# Allegro board splendera.brd
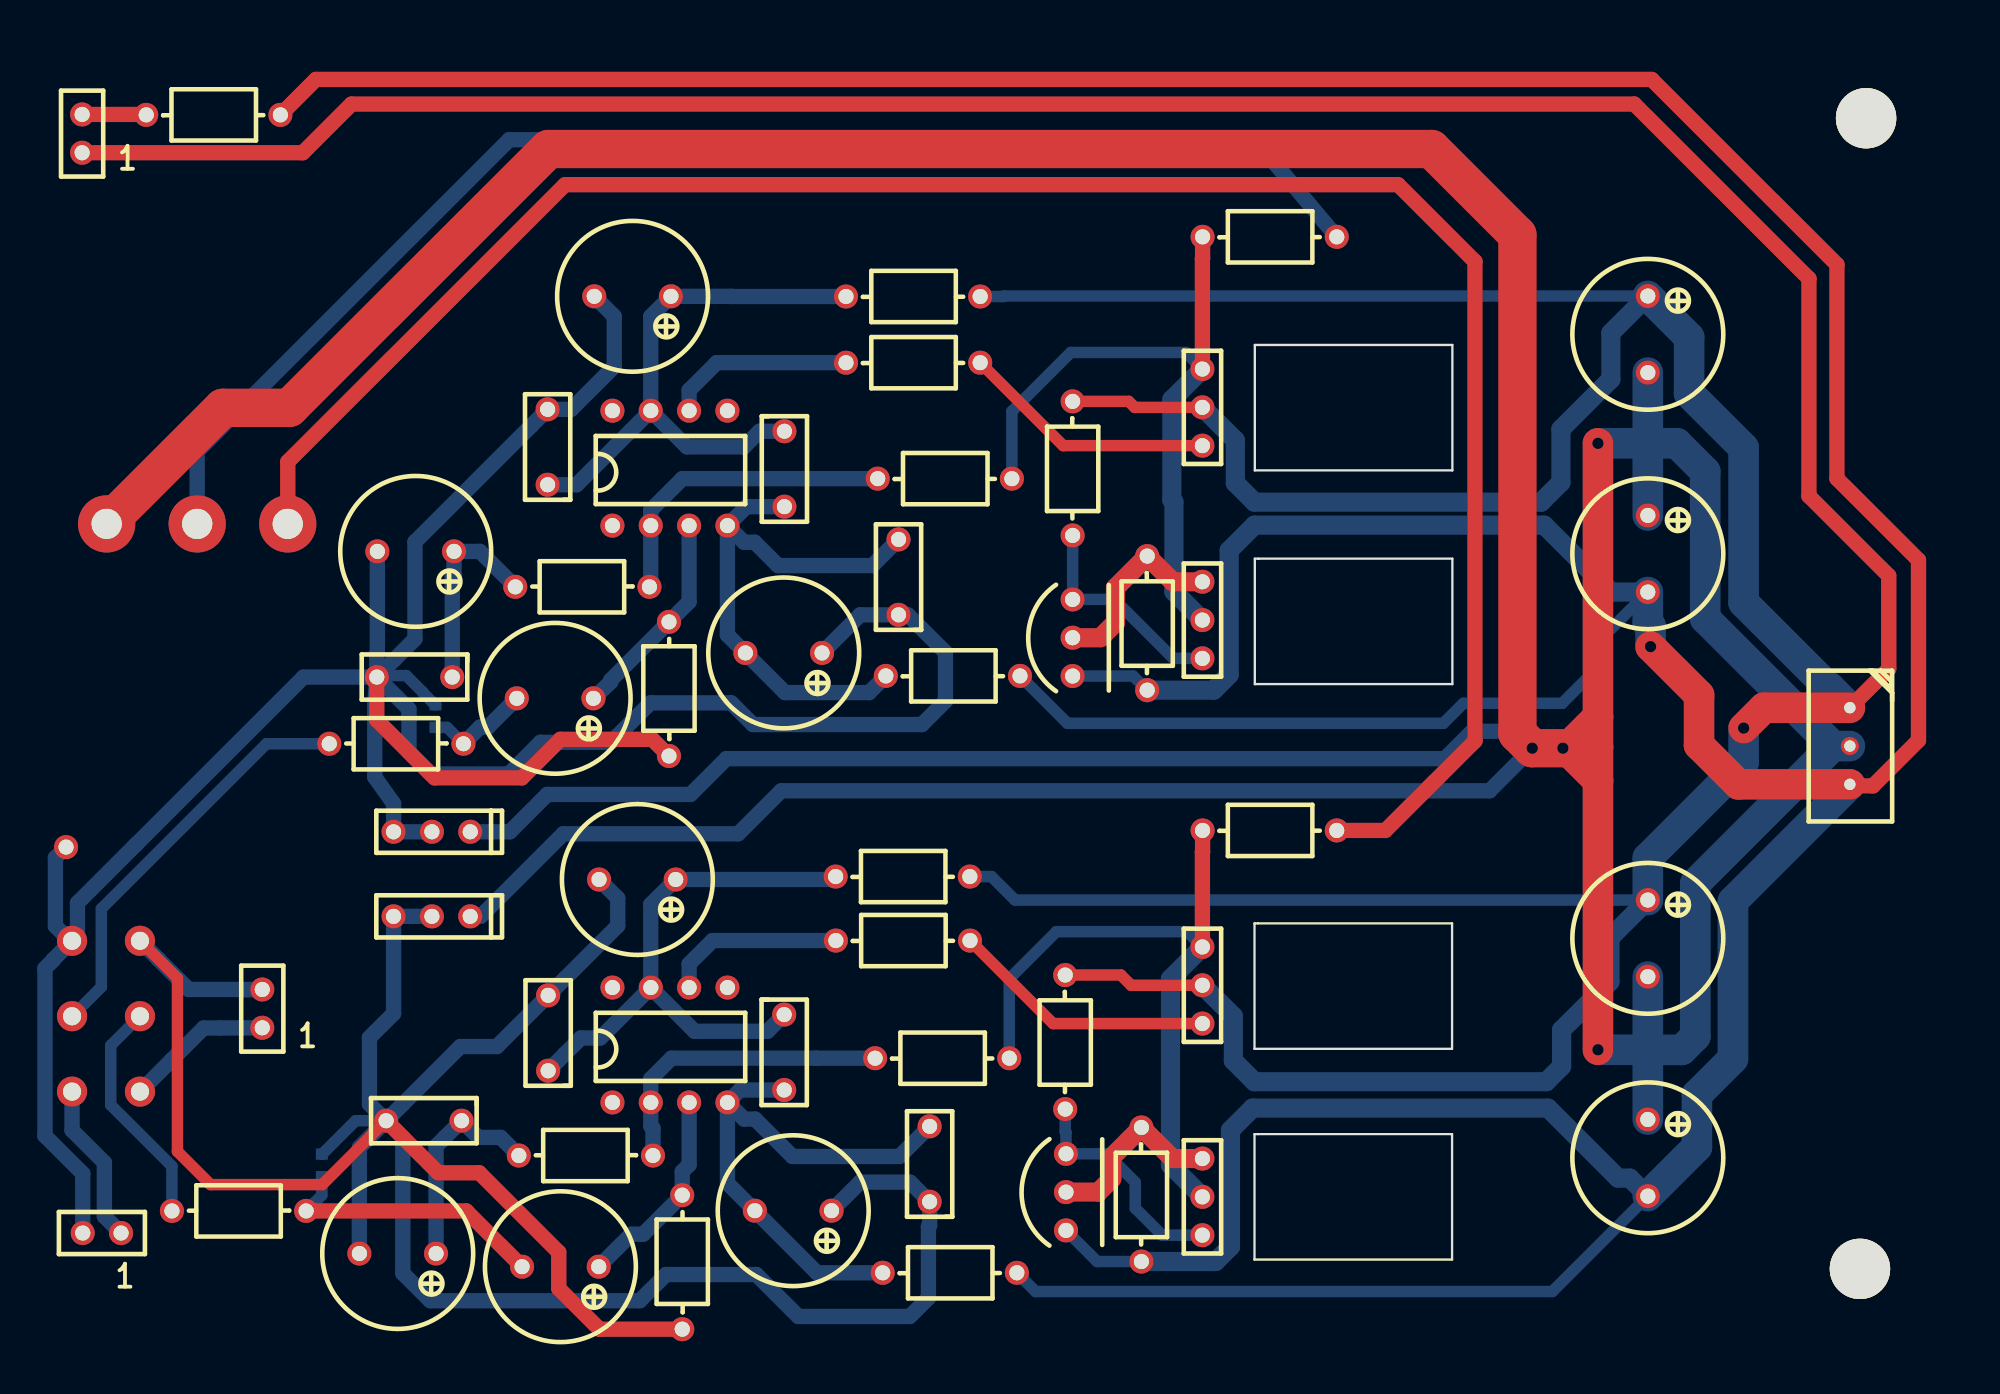
[diagram p0: board, top side]
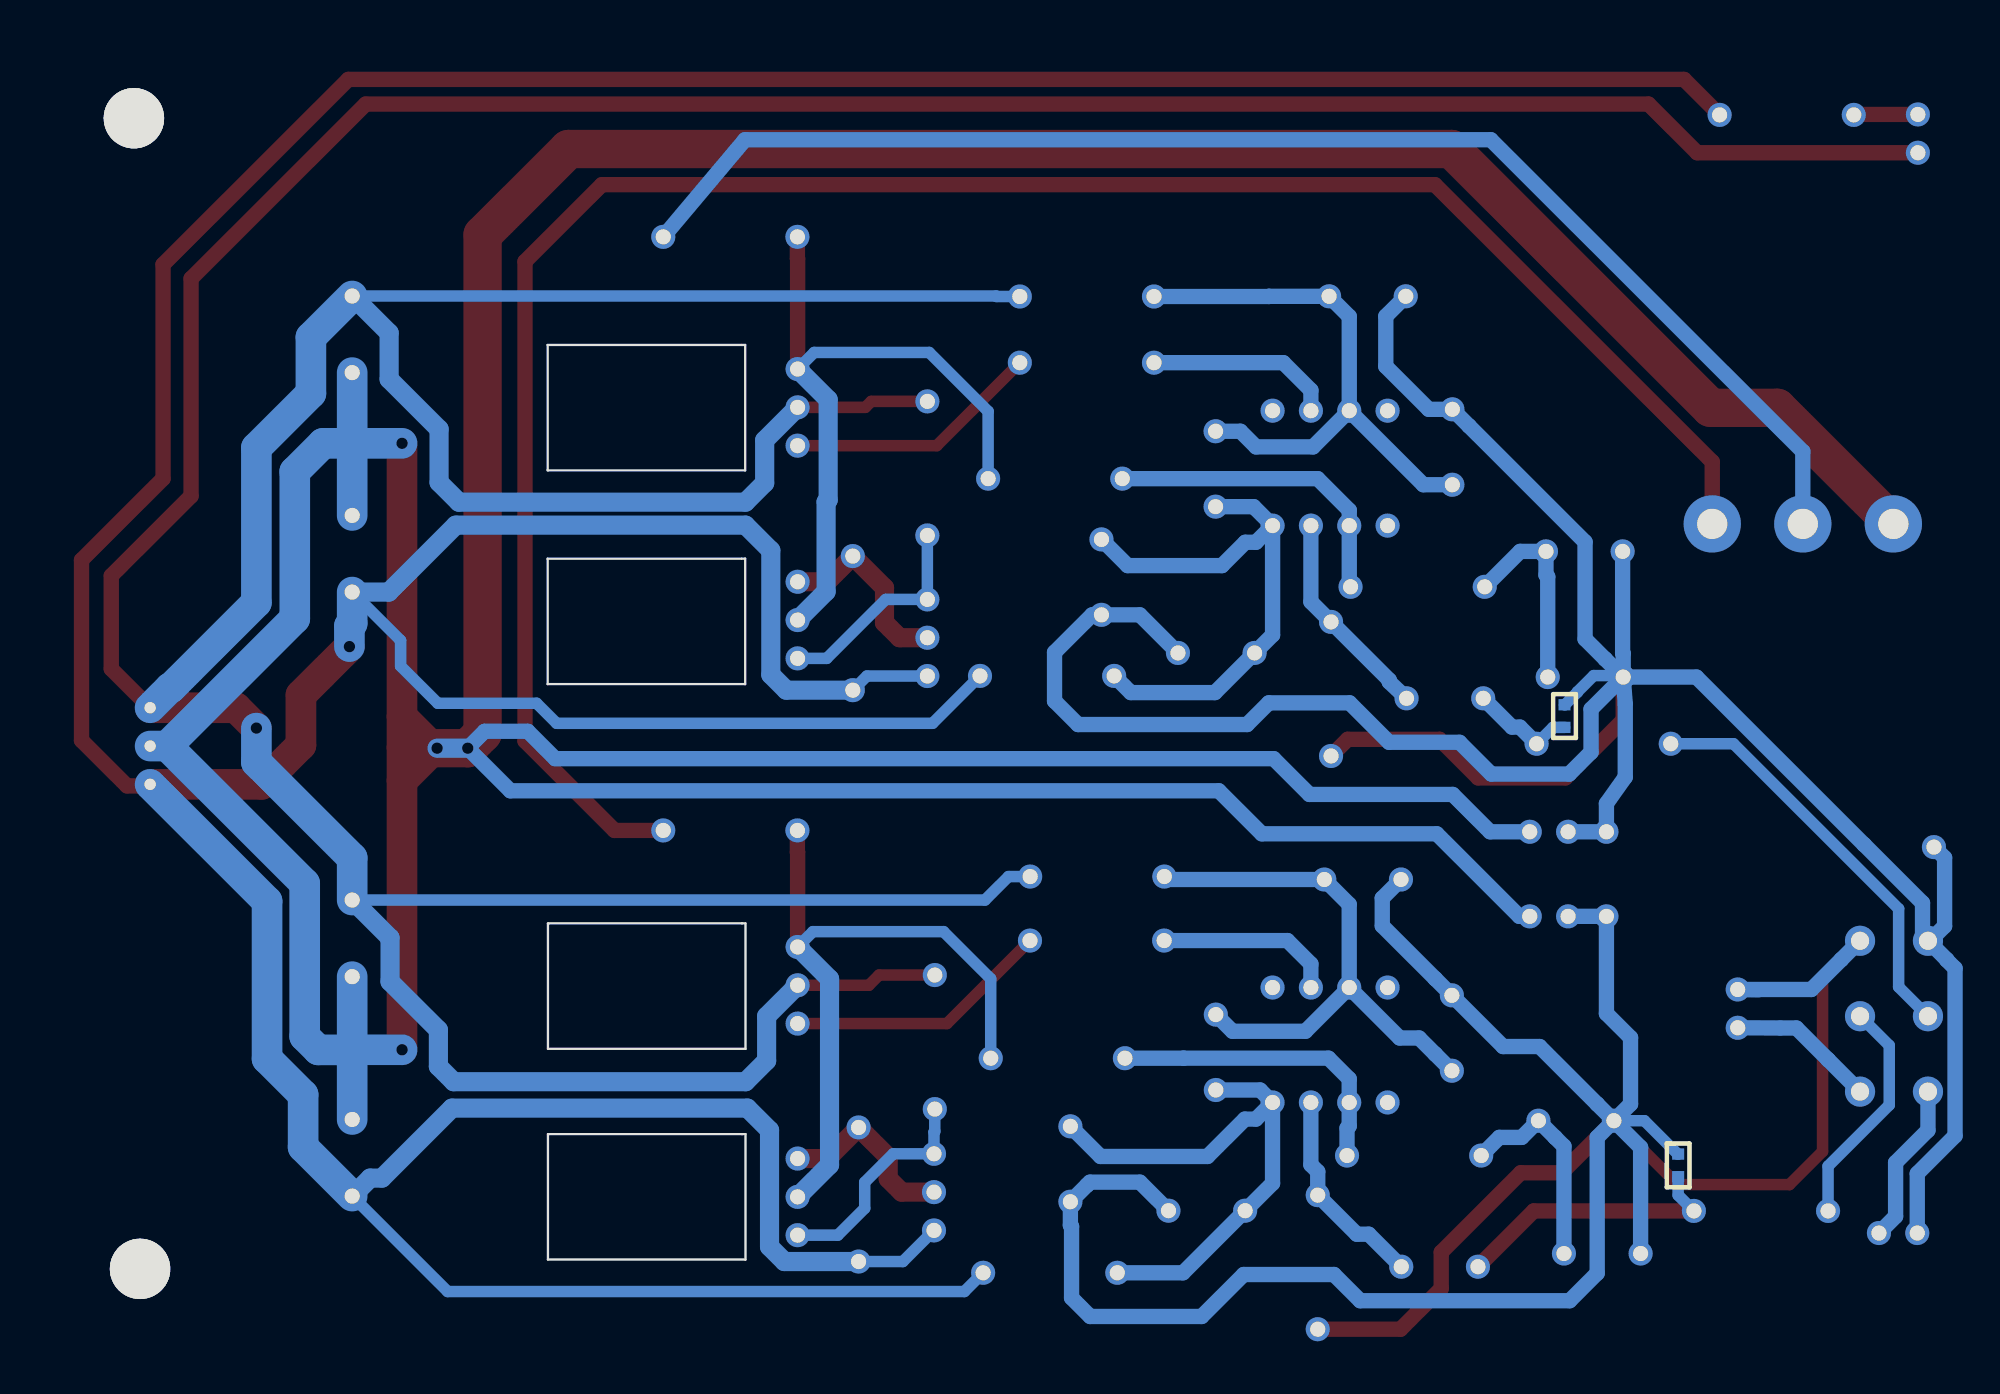
[diagram p1: board, bottom side, seen from below]

Outline 128.52 x 88.44 mm; copper layers: TOP, BOTTOM. Coordinates in mm from the lower left corner of the outline.
Outline path: 0,88.44 0,0 128.52,0 128.52,88.44 0,88.44 ; 81.13,29.21 94.22,29.21 94.22,20.89 81.13,20.89 81.13,29.21 ; 81.13,15.23 94.22,15.23 94.22,6.91 81.13,6.91 81.13,15.23 ; 81.15,67.56 94.24,67.56 94.24,59.24 81.15,59.24 81.15,67.56 ; 81.15,53.39 94.24,53.39 94.24,45.07 81.15,45.07 81.15,53.39

## Placement (name value [footprint] x y rotation side)
C1  330uF  [CAP_5P08_D10]  107.19 28.21 0 top
C2  330uF  [CAP_5P08_D10]  40.23 32.12 270 top
C3  0.1uF  [TH_FILM_5MM3]  34.32 21.94 180 top
C4  0.1uF  [TH_FILM_5MM3]  49.96 20.66 0 top
C5  47uF  [CAP_5P08_D10]  35.13 6.44 270 top
C6  47uF 35V  [CAP_5P08_D10]  24.35 7.32 270 top
C7  104  [TH_FILM_5MM3]  26.09 16.12 270 top
C8  0.1uF  [TH_FILM_5MM3]  59.6 13.25 180 top
C9  330uF  [CAP_5P08_D10]  50.56 10.15 270 top
C10  330uF  [CAP_5P08_D10]  107.19 13.66 0 top
C11  330uF  [CAP_5P08_D10]  107.19 68.27 0 top
C12  0.1uF  [TH_FILM_5MM3]  34.29 60.79 180 top
C13  330uF  [CAP_5P08_D10]  39.92 70.79 270 top
C14  0.1uF  [TH_FILM_5MM3]  49.98 59.34 0 top
C15  47uF  [CAP_5P08_D10]  34.78 44.13 270 top
C16  47uF 35V  [CAP_5P08_D10]  25.54 53.87 270 top
C17  104  [TH_FILM_5MM3]  25.47 45.54 270 top
C18  0.1uF  [TH_FILM_5MM3]  57.54 52.17 180 top
C19  330uF  [CAP_5P08_D10]  49.93 47.14 270 top
C20  330uF  [CAP_5P08_D10]  107.19 53.72 0 top
C21  100p  [C0603]  19.33 12.41 90 bottom
C22  100p  [C0603]  26.86 42.2 90 bottom
D1  LED  [JUMPER2]  3.44 81.58 180 top
J1  CON2  [JUMPER2]  15.38 23.55 180 top
J2  CON3  [POWER_IN3]  120.58 40.97 180 top
J3  CON2  [JUMPER2]  4.75 8.67 270 top
J4  CON3  [HP6P5_2]  11.07 56.55 90 top
Q1  9013  [T9013]  68.64 11.39 0 top
Q2  9013  [T9013]  69.08 48.15 0 top
R1  1k  [TH_RESISTOR1]  11.5 82.82 90 top
R2  47  [TH_RESISTOR1]  57.18 32.31 90 top
R3  1k  [TH_RESISTOR1]  68.58 21.97 0 top
R4  33  [TH_RESISTOR1]  57.2 28.07 90 top
R5  10k  [TH_RESISTOR1]  43.21 6.11 180 top
R6  100  [TH_RESISTOR1]  81.5 35.37 90 top
R7  ALPS617  [ALPS117G]  5.02 23.05 180 top
R8  10k  [TH_RESISTOR1]  59.8 20.27 90 top
R9  1k  [TH_RESISTOR1]  37.46 13.81 270 top
R10  6.8  [TH_RESISTOR1]  73.63 11.86 0 top
R11  47  [TH_RESISTOR1]  60.3 6.04 90 top
R12  47  [TH_RESISTOR1]  57.87 70.77 90 top
R13  1k  [TH_RESISTOR1]  69.08 60.01 0 top
R14  33  [TH_RESISTOR1]  57.87 66.39 90 top
R15  10k  [TH_RESISTOR1]  42.33 44.12 180 top
R16  100  [TH_RESISTOR1]  81.5 74.73 90 top
R17  10k  [TH_RESISTOR1]  59.97 58.7 90 top
R18  1k  [TH_RESISTOR1]  37.22 51.52 270 top
R19  6.8  [TH_RESISTOR1]  74.02 49.75 0 top
R20  47  [TH_RESISTOR1]  60.51 45.62 90 top
R21  1k  [TH_RESISTOR1]  24.9 41.12 270 top
R22  100k  [VAR_RES3]  21.54 35.28 270 top
R23  100k  [VAR_RES3]  21.54 29.67 270 top
R24  1k  [TH_RESISTOR1]  14.47 10.14 270 top
TP1  TEST POINT  [TH_TEST1]  2.38 36.8 0 top
TP2  HOLE D=4mm  [HOLE_4P0]  121.24 6.3 0 top
TP3  HOLE D=4mm  [HOLE_4P0]  121.65 82.6 0 top
U1  MJE340_ON  [MJE340_SMALL]  77.67 25.1 0 top
U2  NE5534  [NE5532DIP]  42.39 21.14 90 top
U3  MJE340_ON  [MJE340_SMALL]  77.67 11.07 0 top
U4  MJE340_ON  [MJE340_SMALL]  77.67 63.42 0 top
U5  NE5534  [NE5532DIP]  42.39 59.39 90 top
U6  MJE340_ON  [MJE340_SMALL]  77.67 49.32 0 top

## Library data of the parts
C1 C2 C6 C9-C11 C13 C16 C19 C20 = C_elect_0
C3-C5 C7 C8 C12 C14 C15 C17 C18 C21 C22 = C
D1 = LED
J1 J3 = CON2
J2 J4 = CON3
Q1 Q2 = Q2N3904
R1-R6 R8-R21 R24 = R
R7 = ALPS617
R22 R23 = RESISTOR VAR
TP1-TP3 = TEST POINT
U1 U3 U4 U6 = MJE340_ON
U2 U5 = NE5534_0

## Footprints (pads in the part's own frame, mm; a bottom-side part is the same pattern mirrored in y, then rotated)
ALPS117G
  round 2 hole 1.2: 1(-2.25,5) 2(-2.25,0) 3(-2.25,-5) 4(2.25,5) 5(2.25,0) 6(2.25,-5)
C0603
  rect 0.75x0.8 smd: 1(0.004,0) 2(1.504,0)
CAP_5P08_D10
  round 1.6 hole 1: 1(0,2.54) 2(0,-2.54)
HOLE_4P0
  round 4 hole 4: 1(0,0)
HP6P5_2
  round 3.8 hole 2: 1(-0.858,6) 2(-0.858,0) 3(-0.858,-6)
JUMPER2
  round 1.6 hole 1: 1(0,1.27) 2(0,-1.27)
MJE340_SMALL
  round 1.6 hole 1: 1(0,2.54) 2(0,0) 3(0,-2.54)
NE5532DIP
  round 1.6 hole 1: 1(-3.81,3.81) 2(-3.81,1.27) 3(-3.81,-1.27) 4(-3.81,-3.81) 5(3.81,-3.81) 6(3.81,-1.27) 7(3.81,1.27) 8(3.81,3.81)
POWER_IN3
  round 1.2 hole 0.75: 1(0,-2.54) 2(0,0) 3(0,2.54)
T9013
  round 1.6 hole 1: 1(0,-2.54) 2(0,0) 3(0,2.54)
TH_FILM_5MM3
  round 1.6 hole 1: 1(0,-2.5) 2(0,2.5)
TH_RESISTOR1
  round 1.6 hole 1: 1(0,-5.08) 2(0,3.81)
TH_TEST1
  round 1.6 hole 1: 1(0,-2.54)
VAR_RES3
  round 1.6 hole 1: 1(0,7.62) 2(0,5.08) 3(0,2.54)

## Nets
GND: C1.2(-) C10.1(+) C11.2(-) C20.1(+) J2.2 J4.1 R22.1(A) R23.1(A)
GND_SIGNAL_L: C2.2(-) C3.1 C6.2(-) C7.1 C8.2 C9.1(+) C21.2 J1.2 R5.2 R7.3 R23.2(WIPER) R23.3(B)
GND_SIGNAL_R: C12.1 C13.2(-) C16.2(-) C17.1 C18.2 C19.1(+) C22.2 J3.2 R7.6 R15.2 R22.2(WIPER) R22.3(B) TP1.1
VCC_9V: C1.1(+) C11.1(+) D1.1(ANODE) J2.1 R2.1 R3.2 R12.1 R13.2 U1.2(C) U4.2(C)
VCC_N9V: C10.2(-) C20.2(-) J2.3 Q1.1(E) Q2.1(E) R1.1 R10.1 R11.1 R19.1 R20.1
LEFT_IN: J1.1 R7.1
LEFT_OUT: J4.3 R6.1
RIGHT_IN: J3.1 R7.4
RIGHT_OUT: J4.2 R16.1
N191282: R8.2 R9.2 U2.2(-IN)
N191294: C6.1(+) C7.2 R9.1
N191348: Q1.2(B) R10.2 U3.1(E)
N191366: Q1.3(C) R3.1 U3.3(B)
N191426: R6.2 R8.1 U1.1(E) U3.2(C)
N219499: R7.2 R24.1
N254338: R4.1 U1.3(B)
N260066: R4.2 U2.6(OUT)
N264502: C5.1 R5.1 U2.3(+IN)
N269050: C2.1(+) C3.2 C4.2 R2.2 U2.7(V+)
N356031: D1.2(CATHODE) R1.2
N361933: C4.1 C8.1 C9.2(-) R11.2 U2.4(V-)
N373916: C14.1 C18.1 C19.2(-) R20.2 U5.4(V-)
N373962: R14.2 U5.6(OUT)
N373984: C16.1(+) C17.2 R18.1
N374114: C12.2 C13.1(+) C14.2 R12.2 U5.7(V+)
N374182: C15.1 R15.1 U5.3(+IN)
N374210: R16.2 R17.1 U4.1(E) U6.2(C)
N374220: Q2.3(C) R13.1 U6.3(B)
N374232: R14.1 U4.3(B)
N374310: R17.2 R18.2 U5.2(-IN)
N374370: Q2.2(B) R19.2 U6.1(E)
N374716: R7.5 R21.1
N393135: C15.2 C22.1 R21.2
N402757: C5.2 C21.1 R24.2

Pads without a net: TP2 1; TP3 1; U2 1 5 8; U5 1 5 8

## Via types
v1: diameter 1.2, hole 0.75, TOP to BOTTOM, 6 vias

## Routing (per net, layer and track width the routed paths; a pad name or vN(x,y) marks a point on that pad's centre or on a via; arc(x,y) is an arc through that point)
GND: length 421.3
  TOP w2.032: v1(103.88,61.04) 103.88,42.9 ; 103.88,42.9 101.8,40.82 ; 103.88,42.9 103.88,40.89 ; 103.88,38.66 v1(103.88,20.83) ; 103.88,38.66 103.88,40.89 ; 103.88,38.66 101.72,40.82 ; 101.72,40.82 101.8,40.82 ; 101.72,40.82 v1(101.56,40.82) ; 101.8,40.82 103.81,40.82 103.88,40.89
  TOP w2.54: J4.1 12.77,63.39 17.18,63.39 34.34,80.55 92.85,80.55 98.55,74.86 98.55,41.81 v1(99.53,40.82) v1(101.56,40.82)
  BOTTOM w1.016: R23.1 29.85,29.67 35.32,35.15 46.91,35.15 49.76,38 96.71,38 v1(99.53,40.82) 98.41,41.94 95.55,41.94 93.74,40.13 46.13,40.13 43.76,37.76 34.26,37.76 31.79,35.28 R22.1
  BOTTOM w1.27: v1(99.53,40.82) v1(101.56,40.82)
  BOTTOM w2.032: 107.19,61.04 v1(103.88,61.04) ; 107.19,61.04 C11.2 ; 107.19,61.04 C20.1 ; 107.19,61.04 109.12,61.04 110.99,59.16 110.99,49.42 119.44,40.97 ; 119.44,40.97 110.34,31.86 110.34,21.72 109.44,20.82 107.19,20.82 ; 119.44,40.97 J2.2 ; C10.1 107.19,20.82 ; 107.19,20.82 C1.2 ; 107.19,20.82 107.18,20.83 v1(103.88,20.83)
GND_SIGNAL_L: length 188
  TOP w0.762: R7.3 9.76,25.57 9.76,14.08 11.95,11.88 19.35,11.88 22.57,15.11 C7.1
  TOP w1.016: C7.1 27.04,12.67 29.75,12.67 35.02,7.4 35.02,4.99 37.72,2.3 R5.2
  BOTTOM w0.762: C7.1 21.56,16.12 19.35,13.91 C21.2
  BOTTOM w1.016: 14,24.8 J1.2 10.5,24.82 8.52,26.8 R7.3 ; C7.1 22.48,17.23 22.48,21.63 24.08,23.23 R23.3 R23.2 ; C7.1 24.69,15.02 24.69,6.01 26.52,4.18 40.39,4.18 42.13,5.92 48.12,5.92 50.9,3.14 58.28,3.14 59.52,4.38 59.52,9.11 59.6,9.19 C8.2 58.49,11.85 58.3,12.05 54.99,12.05 C9.1 ; C7.1 21.81,14.35 C6.2 ; C7.1 24.69,17.23 28.5,21.04 30.92,21.04 C3.1 35.43,25.54 38.93,29.05 38.93,30.88 C2.2
GND_SIGNAL_R: length 200.6
  TOP w1.016: R15.2 41.22,41.41 35.14,41.41 32.58,38.85 26.8,38.85 22.97,42.69 C17.1
  BOTTOM w0.762: 23.06,45.64 24.92,45.64 26.01,44.55 26.01,44.53 26.83,43.7 C22.2
  BOTTOM w1.016: 2.77,27.92 3.13,28.28 3.13,30.56 7.01,34.43 7.01,34.43 18.12,45.54 C17.1 ; 2.77,27.92 1.67,29.03 1.67,33.56 TP1.1 ; 2.77,27.92 R7.6 1.53,26.8 1.53,26.78 0.98,26.23 0.98,15.12 3.48,12.62 J3.2 ; C13.2 38.7,69.46 38.7,66.14 35.85,63.29 C12.1 33.18,62.19 25.49,54.5 25.49,48.07 24.17,46.74 23.06,45.64 C17.1 ; C16.2 23,47.14 22.97,47.1 C17.1 ; C17.1 25.1,43.41 25.1,40.56 26.55,39.11 31.7,39.11 33.81,41.21 38.48,41.21 41.1,43.83 46.45,43.83 47.89,42.39 59.09,42.39 60.65,43.95 60.65,47.18 58.16,49.67 C18.2 55,49.67 C19.1 ; C17.1 22.83,43.77 22.83,38.91 24.08,37.15 R22.3 R22.2
VCC_9V: length 400
  TOP w0.762: U1.2 72.95,25.1 72.27,25.78 R3.2 ; U4.2 73.19,63.42 72.79,63.82 R13.2
  TOP w1.016: J2.1 123.15,46.08 123.15,52.26 117.86,57.54 117.86,71.96 106.29,83.54 21.29,83.54 18.06,80.31 D1.1
  TOP w2.032: J2.1 114.88,43.51 v1(113.54,42.16)
  BOTTOM w0.762: R2.1 63.7,32.31 65.26,30.75 C1.1 ; C11.1 64.52,70.81 64.49,70.77 R12.1
  BOTTOM w1.27: C11.1 104.74,68.36 104.74,65.29 101.43,61.98 101.43,58.45 100.12,57.14 81.13,57.14 79.86,58.41 79.86,61.24 U4.2 ; C1.1 104.68,28.25 104.68,25.35 101.48,22.14 101.48,19.72 100.46,18.71 81.12,18.71 79.73,20.1 79.73,23.05 U1.2
  BOTTOM w2.032: C11.1 109.92,68.07 109.92,64.35 113.54,60.74 113.54,50.48 119.19,44.83 119.25,44.83 J2.1 ; v1(113.54,42.16) 113.54,39.9 107.19,33.55 C1.1
VCC_N9V: length 397
  TOP w1.016: J2.3 120.68,38.32 122.11,38.32 125.12,41.34 125.12,53.3 119.72,58.7 119.72,72.89 107.44,85.17 18.93,85.17 R1.1
  TOP w2.032: v1(107.37,47.56) 110.58,44.35 110.58,41.03 113.19,38.43 J2.3
  BOTTOM w0.762: C20.2 103.98,47.97 103.98,46.27 101.51,43.8 94.97,43.8 93.64,42.47 68.73,42.47 R20.1 ; R10.1 70.7,6.78 Q1.1 ; Q2.1 73.08,45.61 R19.1 ; C10.2 100.86,4.8 66.62,4.8 R11.1
  BOTTOM w1.016: 69.07,45.62 Q2.1
  BOTTOM w1.27: R19.1 78.42,44.67 79.45,45.7 79.45,53.94 81.13,55.61 100.32,55.61 104.76,51.18 C20.2 ; C10.2 105.99,12.32 105.21,12.32 100.57,16.96 81,16.96 79.53,15.49 79.53,7.77 78.55,6.78 R10.1
  BOTTOM w2.032: J2.3 112.83,30.68 112.83,20.23 110.44,17.84 110.44,14.37 C10.2 ; C20.2 107.19,49.11 107.37,48.92 v1(107.37,47.56)
LEFT_IN: length 9.9
  BOTTOM w1.016: R7.1 9.4,20.17 11.49,22.27 12.57,22.27 J1.1
LEFT_OUT: length 135.9
  TOP w1.016: R6.1 89.8,35.37 95.74,41.3 95.74,73.09 90.64,78.19 35.44,78.19 17.07,59.81 J4.3
RIGHT_IN: length 10.7
  BOTTOM w1.016: J3.1 4.92,9.78 4.92,13.34 2.77,15.49 R7.4
RIGHT_OUT: length 91.9
  BOTTOM w1.016: R16.1 81.16,81.17 31.74,81.17 11.07,60.5 J4.2
N191282: length 20.6
  BOTTOM w1.016: R8.2 52.09,20.27 52.09,20.27 42.5,20.27 41.12,18.9 U2.2 41.12,15.77 41.27,15.63 R9.2
N191294: length 14.3
  BOTTOM w1.016: R9.1 31.17,15.02 29.69,15.02 C7.2 27.48,15.02 26.89,14.43 C6.1
N191348: length 12.5
  TOP w1.27: Q1.2 70.78,11.39 71.67,12.28 71.67,13.71 R10.2 75.69,13.61 U3.1
N191366: length 15.3
  BOTTOM w0.762: U3.3 75.01,8.53 73.23,10.31 73.23,12.04 71.34,13.93 Q1.3 68.64,15.36 68.58,15.42 R3.1
N191426: length 45.8
  TOP w1.016: R6.2 77.69,33.93 77.67,33.92 U1.1
  BOTTOM w0.762: R8.1 64.88,25.53 68,28.66 76.66,28.66 U1.1
  BOTTOM w1.27: U3.2 75.56,13.19 75.56,25.53 U1.1
N219499: length 15.4
  BOTTOM w0.762: R7.2 5.34,21.12 5.34,17.16 9.39,13.11 R24.1
N254338: length 17.7
  TOP w0.762: U1.3 67.78,22.56 R4.1
N260066: length 11.9
  BOTTOM w1.016: R4.2 45.21,28.07 43.66,26.52 U2.6
N264502: length 13.8
  BOTTOM w1.016: U2.3 43.66,13.2 43.21,12.75 R5.1 40.62,8.6 39.83,8.6 C5.1
N269050: length 38.1
  BOTTOM w1.016: U2.7 41.12,30.46 C2.1 53.18,32.12 R2.2 ; U2.7 44.02,22.05 48.86,22.05 C4.2 ; U2.7 37.78,21.61 36.49,21.61 35.43,20.54 C3.2
N356031: length 4.3
  TOP w1.016: D1.2 7.66,82.85 R1.2
N361933: length 37.9
  BOTTOM w1.016: R11.2 52.14,6.04 C9.2 46.2,11.97 U2.4 ; U2.4 47.03,18.16 C4.1 ; U2.4 47.31,16.23 48.04,16.23 50.51,13.75 57.6,13.75 C8.1
N373916: length 37.2
  BOTTOM w1.016: U5.4 47.3,54.48 48.01,54.48 49.56,52.93 55.8,52.93 C18.1 ; U5.4 47.46,56.84 C14.1 ; U5.4 46.2,48.33 C19.2 50.02,44.51 55.59,44.51 R20.2
N373962: length 12.5
  BOTTOM w1.016: R14.2 45.49,66.39 43.66,64.56 U5.6
N373984: length 13.4
  BOTTOM w1.016: R18.1 29.79,53.87 C16.1 28.08,52.31 27.97,52.2 C17.2
N374114: length 38.9
  BOTTOM w1.016: R12.2 46.45,70.77 46.43,70.79 C13.1 41.12,69.45 U5.7 ; U5.7 43.52,60.8 47.29,60.8 48.33,61.84 C14.2 ; U5.7 36.21,58.29 C12.2
N374182: length 14.1
  BOTTOM w1.016: U5.3 43.66,50.53 R15.1 38.47,45.34 38.47,45.22 C15.1
N374210: length 46.3
  TOP w1.016: R16.2 77.69,73.29 77.67,73.28 U4.1
  BOTTOM w0.762: U4.1 76.57,67.06 68.95,67.06 65.05,63.16 R17.1
  BOTTOM w1.27: U4.1 75.65,63.94 75.65,57.28 75.79,57.15 75.79,51.21 U6.2
N374220: length 14.5
  BOTTOM w0.762: R13.1 Q2.3 71.83,50.69 75.74,46.78 U6.3
N374232: length 17
  TOP w0.762: R14.1 68.45,60.88 U4.3
N374310: length 21
  BOTTOM w1.016: R18.2 41.12,51.61 U5.2 41.12,56.6 43.22,58.7 R17.2
N374370: length 12.9
  TOP w1.27: U6.1 75.72,51.86 R19.2 71.92,51.46 71.92,49.15 70.91,48.15 Q2.2
N374716: length 27.6
  BOTTOM w0.762: R21.1 15.66,41.12 4.72,30.18 4.72,24.99 R7.5
N393135: length 7.1
  BOTTOM w0.762: R21.2 27.62,42.2 C22.1
  BOTTOM w1.016: R21.2 29.81,42.22 30.33,42.22 C15.2
N402757: length 18.5
  TOP w1.016: R24.2 28.9,10.14 C5.2
  BOTTOM w0.762: R24.2 19.33,11.18 C21.1
